# Altium PCB DataPCB 2.1.PcbDoc
Units mil, origin at the board's own origin, x right, y up, seen from the top; angles counter-clockwise.
Board outline 1500 x 1687.5 mil, 2 copper layers (Top Layer, Bottom Layer); 51 components, 66 nets, 295 pads, 137 vias.
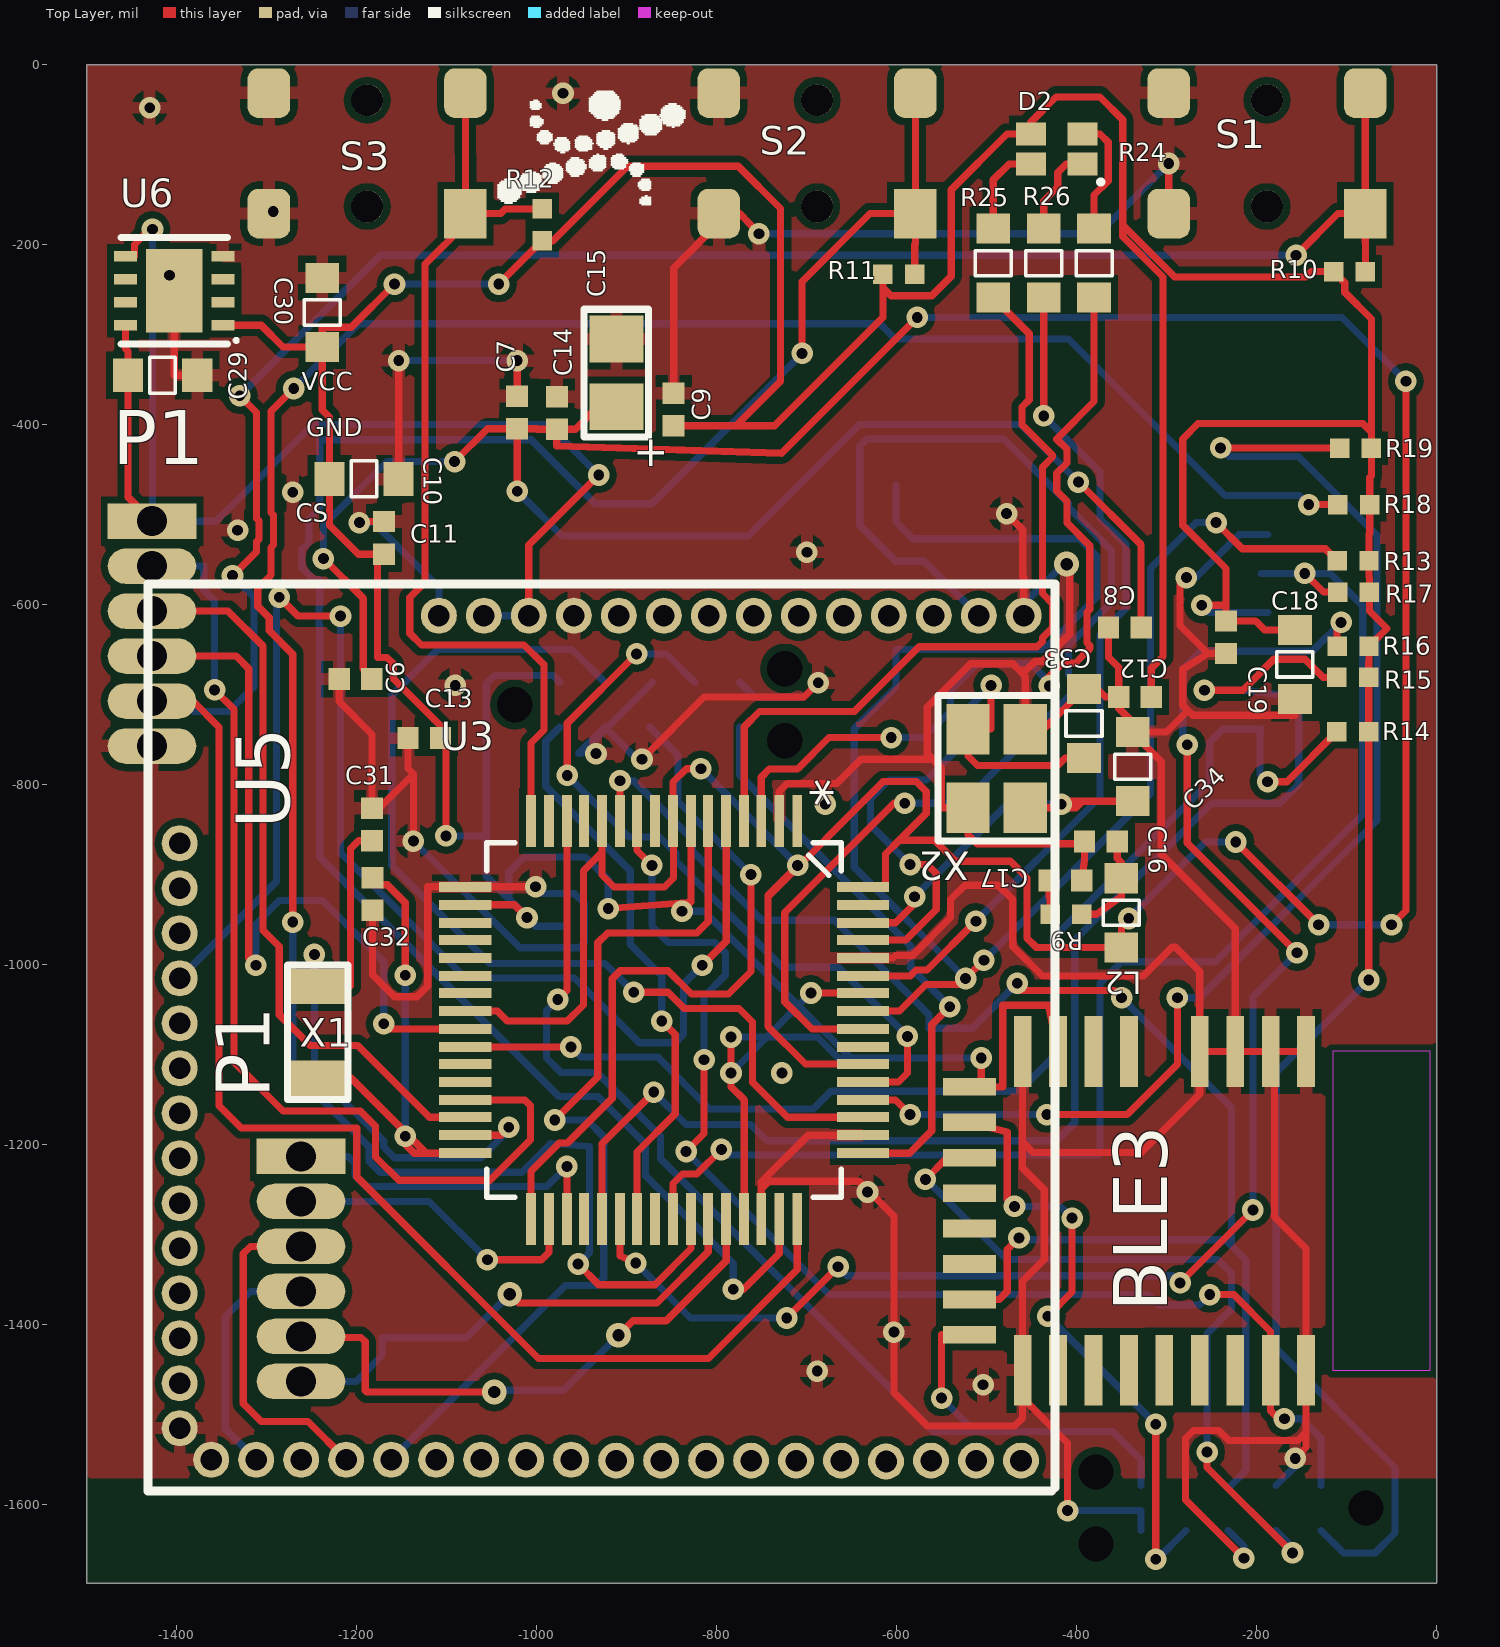
[diagram p0: Top Layer view]
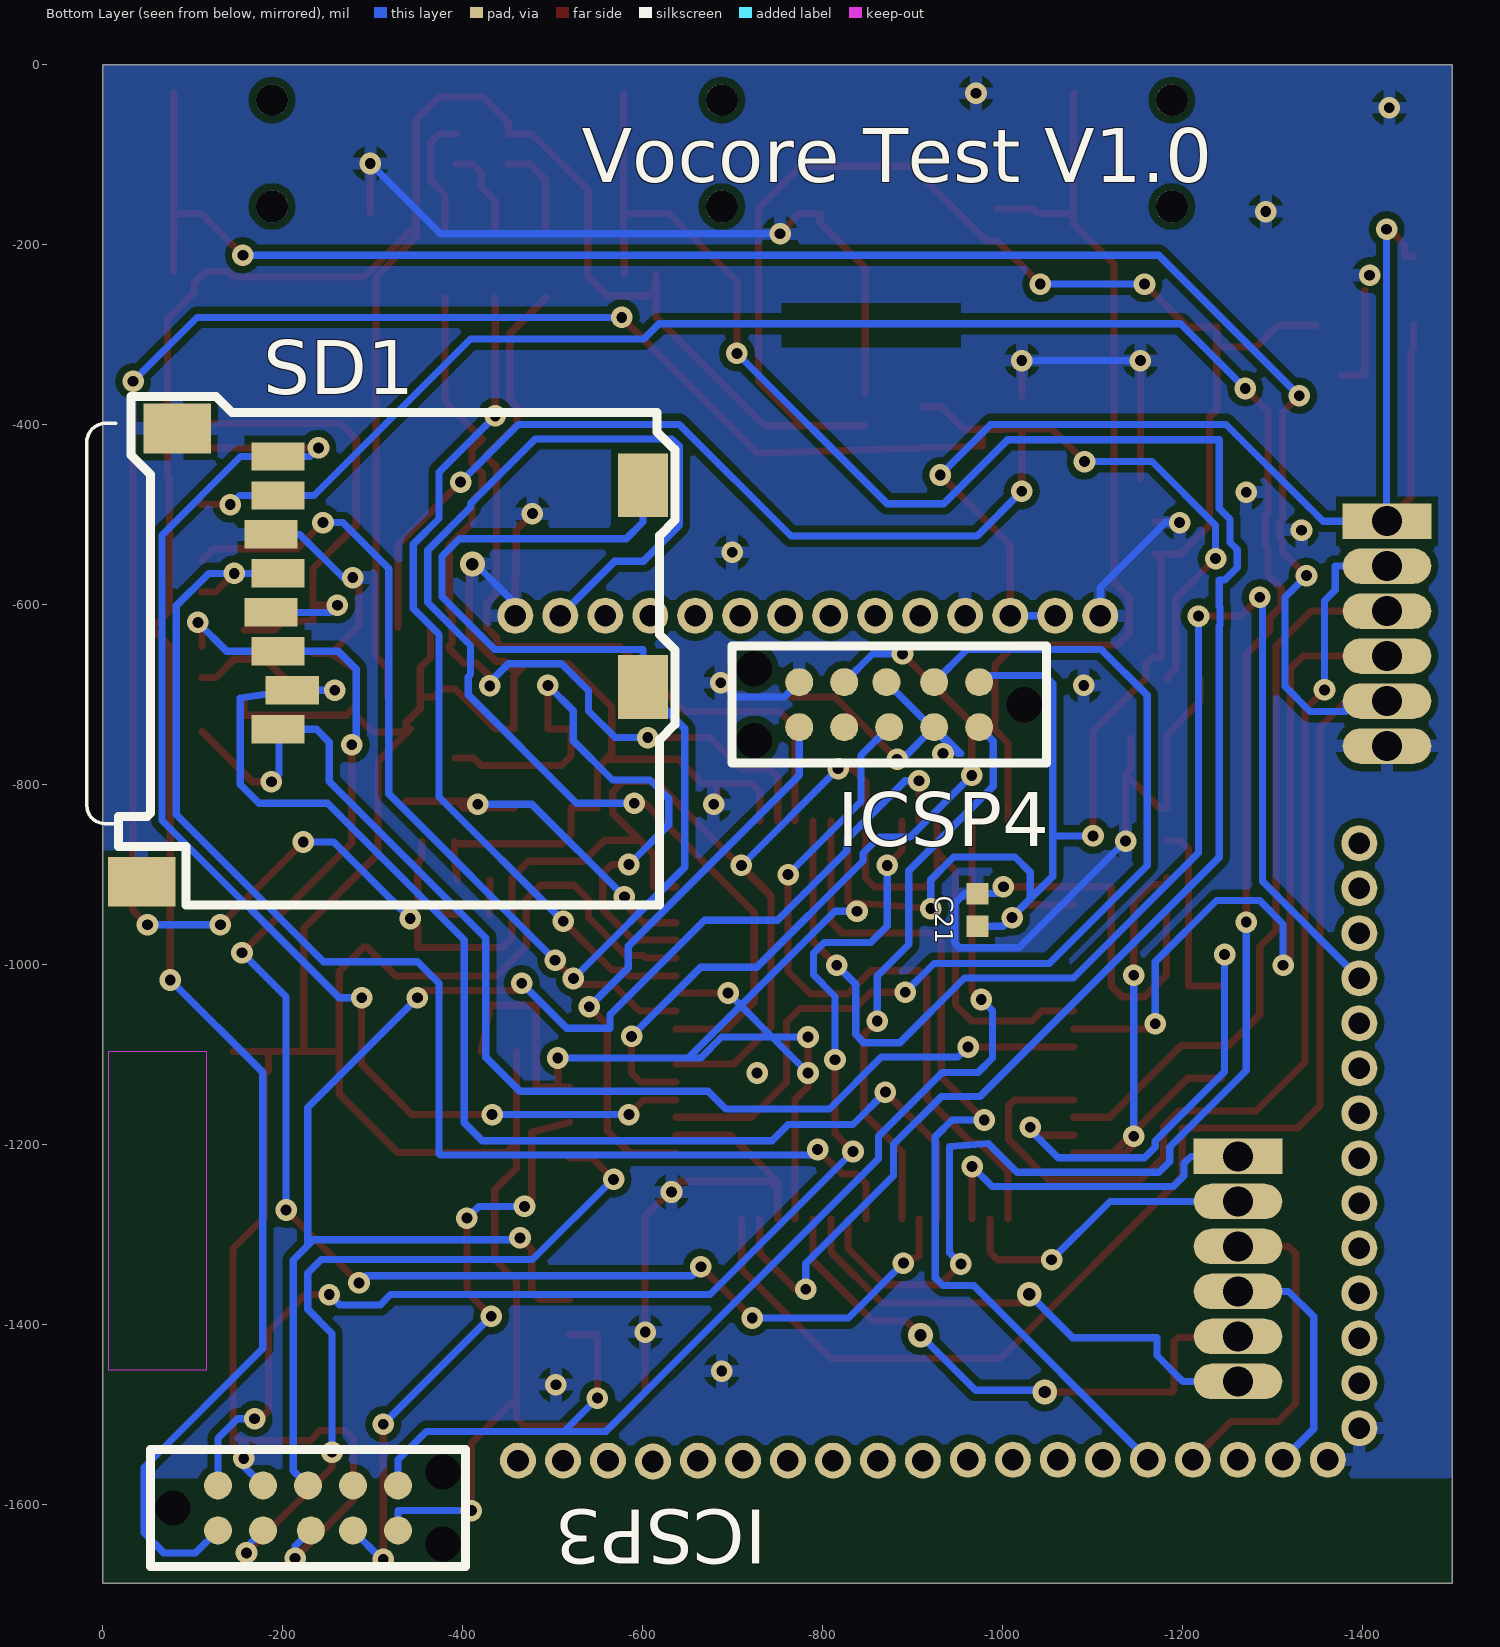
[diagram p1: Bottom Layer view, seen from below]

## Layer stack, top to bottom
Top Solder: solder mask 0.4, Solder Resist, Dk 3.5
Top Layer: signal copper 1.4
Dielectric 1: dielectric 12.6, FR-4, Dk 4.8
Bottom Layer: signal copper 1.4
Bottom Solder: solder mask 0.4, Solder Resist, Dk 3.5

## Board outline
-1500,-1687.5 -1500,0 0,0 0,-1687.5 -62.26,-1687.5 -416.54,-1687.45 -572.79,-1687.45 -572.83,-1687.5 -1083.42,-1687.5

## Design rules (kind name [scope] priority, off if disabled: settings)
Clearance [All] p1: gap=8
ComponentClearance ComponentClearance_1 [InComponent('U5')] p1: gap=-1000 collisioncheckmode=3 verticalgap=100000 showdistances=FALSE
ComponentClearance [All] p2: gap=10 collisioncheckmode=3 verticalgap=10 showdistances=FALSE
PlaneConnect [All] p1: planeconnectstyle=Relief reliefexpansion=20 reliefentries=4 reliefconductorwidth=13.78 reliefairgap=7.87
PolygonConnect [All] p1: connectstyle=Relief reliefconductorwidth=13.78 reliefentries=4 polygonreliefangle="90 Angle" airgapwidth=7.87
RoutingVias [All] p1: holewidth=12 width=24 viastyle="Through Hole" minholewidth=12 minwidth=24 maxholewidth=50 maxwidth=100
SilkToSilkClearance [All] p1: silktosilkclearance=0
SilkToSolderMaskClearance [IsPad] p1: minsilkscreentomaskgap=0 clearancetoexposedcopper=TRUE
SolderMaskExpansion [All] p1: expansion=4
Width [All] p1: maxlimit=78.74 minlimit=7 preferedwidth=8
26 further rules are at their usual default settings.

## Components (designator, comment, footprint, x,y, rotation, side; value= is the part's Value field where it differs from the comment)
BLE3 "QS9322" QS9322 -519,-1096.5 r270 top
C6 "" "CAP 0402" -1201.39,-682.79 r180 top
C7 "" "CAP 0402" -1021.69,-386.4 r90 top
C8 "" "CAP 0402" -346.37,-625.51 r180 top
C9 "" "CAP 0402" -847.71,-383.08 r90 top
C10 "" 0603 -1191.11,-460.18 r0 top
C11 "" "CAP 0402" -1169.75,-525.8 r90 top
C12 "" "CAP 0402" -335.08,-702.6 r180 top
C13 "" "CAP 0402" -1124.96,-748.41 r180 top
C14 "" "CAP 0402" -977.6,-386.93 r90 top
C15 "" 0805 -911.3,-342.66 r90 top
C16 "" "CAP 0402" -372.96,-863.33 r180 top
C17 "" "CAP 0402" -412.43,-906.35 r180 top
C18 "" 0603 -157.21,-667.05 r270 top
C19 "" "CAP 0402" -233.91,-636.25 r270 top
C21 "" "CAP 0402" -972.18,-939.26 r90 bottom
C29 "" 0603 -1414.98,-344.8 r0 top
C30 "" 0603 -1238.43,-274.67 r90 top
C31 "" "CAP 0402" -1182.93,-844.22 r90 top
C32 "" "CAP 0402" -1182.3,-921.54 r270 top
C33 "4pF" 0603 -391.87,-731.32 r90 top
C34 "4pF" 0603 -337.78,-779.35 r90 top
D2 "LED2_RGB" "LED RGB" -422.05,-93.7 r180 top locked
ICSP3 "TC2050" TC2050-IDC-NL -78.4,-1603.77 r180 bottom
ICSP4 "TC2050" TC2050-IDC-NL -1024.3,-711.11 r0 bottom
L2 "" 0603 -350.11,-943.12 r270 top
P1 "header 6 pin" "Header 6 1.27mm" -1427.48,-507.19 r0 top
P1 "header 6 pin" "Header 6 1.27mm" -1261.9,-1213.2 r0 top
R9 "" "RES 0402" -411.76,-944.08 r0 top
R10 "" "RES 0402" -96.67,-229.79 r180 top
R11 "" "RES 0402" -597.5,-232.72 r180 top
R12 "" "RES 0402" -994,-177.94 r270 top
R13 "" "RES 0402" -92.75,-551 r0 top
R14 "" "RES 0402" -93.07,-741.26 r0 top
R15 "" "RES 0402" -93,-680.82 r0 top
R16 "" "RES 0402" -92.75,-646.32 r0 top
R17 "" "RES 0402" -92.26,-586.04 r0 top
R18 "" "RES 0402" -92.01,-488.76 r0 top
R19 "" "RES 0402" -90.05,-426.03 r0 top
R24 "" 0603 -380.72,-219.78 r90 top
R25 "" 0603 -492.65,-219.78 r90 top
R26 "" 0603 -436.69,-219.78 r90 top
S1 "Power" "Tac Sw RA SMT" -187.4,-98.43 r90 top locked
S2 "Action 1" "Tac Sw RA SMT" -687.4,-98.43 r90 top locked
S3 "Action 2" "Tac Sw RA SMT" -1187.4,-98.43 r90 top locked
SD1 "MICRO SD" MICRO_SD_WE -187.23,-608.54 r90 bottom locked (schematic designator SD1x)
U3 "Flash MCU" QFP50P1200X1200X160-64N -858.43,-1061.56 r270 top
U5 "VoCore" VoCore -1431.72,-1585.22 r0 top
U6 "" "DFN8 U-DFN3030-8" -1402.86,-251.19 r90 top
X1 "Xtal 32" "Xtal smd 32khz - larger" -1243.33,-1075.09 r270 top
X2 "Xtal 16" "XTAL SMD 3.2X2.5" -489.07,-781.58 r270 top

## Footprints (in the part's own frame and the unit in brackets; to place one, negate y for a bottom-side part, rotate by r counter-clockwise, add the part's x,y. Pads: shape width x height; smd on the part's side, far side on the other; paste and mask are expansions set on the pad)
0603 [mm] "SMT  0603"
  rect 0.85x0.95 smd: 1(-0.992,-0.003) 2(0.958,-0.003)
  silkscreen extent -0.38,-0.51 0.34,0.5, body extent -0.89,-0.43 0.86,0.42, height 1
0805 [mil]
  rect 52x60 smd: 1(-37.4,0) 2(38,0)
  silkscreen extent -71,-35 71,36
"CAP 0402" [mm] "Chip Capacitor, 2-Leads, Body 1.00x0.50mm, IPC Medium Density"
  rect 0.6x0.62 smd: 1(-0.46,0) 2(0.46,0)
  body extent -0.53,-0.28 0.53,0.27, height 0.4
"DFN8 U-DFN3030-8" [mm]
  rect 2.35x1.6 smd: 0(0,0)
  rect 0.3x0.65 smd: 1(-0.975,-1.375) 2(-0.325,-1.375) 3(0.325,-1.375) 4(0.975,-1.375) 5(0.975,1.375) 6(0.325,1.375) 7(-0.325,1.375) 8(-0.975,1.375)
  silkscreen extent -1.5,-1.8 1.5,1.5
"Header 6 1.27mm" [mm] "SIP Header 1.27mm 6 pins"
  rect 2.5x1 hole 0.85: 1(0,0)
  oval 2.5x1 hole 0.85: 2(0,-1.27) 3(0,-2.54) 4(0,-3.81) 5(0,-5.08) 6(0,-6.35)
  body extent -1.15,-7.15 1.06,0.85, height 6
"LED RGB" [mm] "160-2162-1-ND"
  rect 0.85x0.65 smd: 1(-0.725,0.425) 2(0.725,0.425) 3(-0.725,-0.425) 4(0.725,-0.425)
  silkscreen extent -1.25,0.93 -1.23,0.93, body extent -1.11,-0.75 1.16,0.75, height 1
MICRO_SD_WE [mm] "MICRO SD CARD PUSH-PUSH  from WE  693071010811"
  rect 1.4x1.9 smd: 0(-7.61,3.65) 0(5.19,2.65)
  rect 0.8x1.5 smd: 1(-3.3,-0.2) 2(-2.2,-0.6) 3(-1.1,-0.2) 4(0,0) 5(1.1,-0.2) 6(2.2,0) 7(3.3,-0.2) 8(4.4,-0.2)
  rect 1.8x1.4 smd: CD(-2.11,-10.5) CD(3.59,-10.5)
  silkscreen extent -8.26,-11.4 6.09,5.2, body extent -8.36,-10.87 5.64,4.33, height 1.83
QFP50P1200X1200X160-64N [mil]
  rect 58x11 smd: 1(-221,148) 2(-221,128) 3(-221,108) 4(-221,89) 5(-221,69) 6(-221,49) 7(-221,30) 8(-221,10) 9(-221,-10) 10(-221,-30) 11(-221,-49) 12(-221,-69) 13(-221,-89) 14(-221,-108) 15(-221,-128) 16(-221,-148) 33(221,-148) 34(221,-128) 35(221,-108) 36(221,-89) 37(221,-69) 38(221,-49) 39(221,-30) 40(221,-10) 41(221,10) 42(221,30) 43(221,49) 44(221,69) 45(221,89) 46(221,108) 47(221,128) 48(221,148)
  rect 11x58 smd: 17(-148,-221) 18(-128,-221) 19(-108,-221) 20(-89,-221) 21(-69,-221) 22(-49,-221) 23(-30,-221) 24(-10,-221) 25(10,-221) 26(30,-221) 27(49,-221) 28(69,-221) 29(89,-221) 30(108,-221) 31(128,-221) 32(148,-221) 49(148,221) 50(128,221) 51(108,221) 52(89,221) 53(69,221) 54(49,221) 55(30,221) 56(10,221) 57(-10,221) 58(-30,221) 59(-49,221) 60(-69,221) 61(-89,221) 62(-108,221) 63(-128,221) 64(-148,221)
  silkscreen extent -197,-197 197,197
QS9322 [mm] "QS9322 Bluetooth 4.0 Low Energy Module"
  rect 2x0.5 smd: 1(9,9.5) 2(9,8.5) 3(9,7.5) 4(9,6.5) 5(9,5.5) 6(9,4.5) 7(9,3.5) 8(9,2.5) 9(9,1.5) 18(0,1.5) 19(0,2.5) 20(0,3.5) 21(0,4.5) 22(0,6.5) 23(0,7.5) 24(0,8.5) 25(0,9.5)
  rect 0.5x1.5 smd: 10(8,0) 11(7,0) 12(6,0) 13(5,0) 14(4,0) 15(3,0) 16(2,0) 17(1,0)
  Keep-Out Layer region: 0,10.25 9,10.25 9,13 0,13
  body extent 0,0 9,10.25, height 1
"RES 0402" [mm] "Chip Resistor, 2-Leads, Body 1.00x0.50mm, IPC Medium Density"
  rect 0.55x0.55 smd: 1(-0.45,0) 2(0.45,0)
  body extent -0.53,-0.27 0.53,0.28, height 0.4
"Tac Sw RA SMT" [mm] "TE 1571262-2   SWITCH TACTILE SPST-NO 0.05A 12V"
  round 0.9 hole 0.9 unplated paste+0 mask+0: 0(-1.5,0.025) 0(1.5,0.025)
  rect 1.4x1.2 smd: 1(-1.7,-2.75)
  rrect50% 1.4x1.2 smd: 2(-1.7,2.8) 3(1.7,-2.75) 4(1.7,2.8)
  body extent -2.81,-2.67 4.34,2.73, height 1.7
TC2050-IDC-NL [mm] "Tag-Connect 10-Pin with No Legs (PN# TC2050-IDC-NL)"
  round 0.9 hole 0.995 unplated: 0(0,0) 0(7.62,-1.016) 0(7.62,1.016)
  round 0.79 smd paste-0.39: 1(1.27,-0.635) 2(2.54,-0.635) 3(3.89,-0.635) 4(5.08,-0.635) 5(6.35,-0.635) 6(6.35,0.635) 7(5.08,0.635) 8(3.81,0.635) 9(2.54,0.635) 10(1.27,0.635)
  silkscreen extent -0.63,-1.65 8.26,1.65
VoCore [mil] "Vocore Module headers"
  round 40 hole 24: 1(973,973) 2(923,973) 3(873,973) 4(823,973) 5(773,973) 6(723,973) 7(673,973) 8(623,973) 9(573,973) 10(523,973) 11(473,973) 12(423,973) 13(373,973) 14(323,973) 15(35,720) 16(35,670) 17(35,620) 18(35,570) 19(35,520) 20(35,470) 21(35,420) 22(35,370) 23(35,320) 24(35,270) 25(35,220) 26(35,170) 27(35,120) 29(35,70) 29(70,35) 30(120,35) 31(170,35) 32(220,35) 33(270,35) 34(320,35) 35(370,35) 36(420,35) 37(470,35) 38(520,34) 39(570,34) 40(620,34) 41(670,34) 42(720,34) 43(770,34) 44(820,33) 45(870,34) 46(920,34) 47(970,34)
  silkscreen extent 0,0 1008,1008
"XTAL SMD 3.2X2.5" [mil]
  rect 56x48 smd: 0(-43.31,32) 0(44,-31.5) 1(-43.31,-31.5) 2(44,32)
  silkscreen extent -81,-65 81,65
"Xtal smd 32khz - larger" [mm] "ST3215SB  3.2×1.5mm"
  rect 1x1.55 smd: 1(-1.3,0) 2(1.3,0)
  silkscreen extent -1.9,-0.85 1.9,0.85

## Part data
BLE3: "QS9322 Bluetooth 4.0 Low Energy Module"
C6 C7 C8 C9 C10 C11 C12 C13 C14 C16 C18 C19 C21 C29 C30: library part Cap
C15: library part A01-0492
C17: library part A01-0046
C31 C32: library part A01-0013
C33 C34: library part A01-0018
D2: "RGB Led"
ICSP3 ICSP4: "ICSP Header"
L2: library part Inductor, "Inductor"
R9: library part A02-0284
R10 R11 R12 R13 R14 R15 R16 R17 R18 R19: library part Res3
R24 R25 R26: library part Res3, "Resistor"
S1 S2 S3: library part "SW PUSHBUTTON", "SWITCH TACT 2.36MM SILV J-LEAD"
SD1: library part "MICRO SD SMK"
U3: library part ATSAM3S4BA-AU
U6: library part "AP7361-33FGE-7 LDO 3.3V", "IC REG LDO 3.3V 1A 8DFN"
X2: library part "Xtal 12"

## Via types
v1: diameter 24, hole 12, Top Layer to Bottom Layer, 133 vias
v2: diameter 27.56, hole 13.78, Top Layer to Bottom Layer, 4 vias

## Nets (pads, with @x,y where several pads share a name; then routed paths per layer and width w, separated by ;. In a path a pad name is that pad's centre, name@x,y a point inside that pad or via, vN(x,y) a via of type N, cw(c..) or ccw(c..) an arc to the next point about the centre after c; other vN are vias at no path point)
"ACTION 1 SW": R11.1 S2.1 S2.3 U3.47 | length 2359.7
  Top Layer w8: v1(-781.49,-1360.79) -770.04,-1360.79 -730.43,-1321.18 U3.47 ; v1(-705,-320.75) -705,-240.75 -629.6,-165.35 S2.1 ; R11.1 -579.78,-199.75 -579.13,-199.11 S2.1 ; S2.3 S2.1
  Bottom Layer w8: v1(-781.49,-1360.79) -781.49,-1332.26 -879,-1234.75 -879,-1199.75 -932,-1146.75 -975,-1146.75 -1241,-880.75 -1241,-623.69 -1242,-622.69 -1242,-602.81 -1241,-601.81 -1241,-572.75 -1246.94,-572.75 -1261,-558.69 -1261,-538.81 -1253,-530.81 -1253,-505.12 -1241,-493.12 -1241,-416.75 -1006,-416.75 -935,-487.75 -872,-487.75 v1(-705,-320.75)
"ACTION 2 SW": R12.1 S3.1 S3.3 U3.16 | length 1056.5
  Top Layer w8: S3.3 -1079.13,-98.62 -1079,-98.75 S3.1@-1079,-165.35 ; U3.16 -1006.43,-753.75 -992,-739.32 -992,-666.75 -1014,-644.75 -1128,-644.75 -1141,-631.75 -1141,-592.05 -1124,-575.05 -1124,-221.75 -1079.13,-176.88 S3.1 S3.1@-1079,-165.35 ; R12.1 -1034.87,-160.22 -1040,-165.35 S3.1@-1079,-165.35
BLE1_RX: U3.6 U5.33 | length 1000
  Top Layer w8: v1(-980,-1172.75) -932.08,-1124.83 -932.08,-975.75 -921.08,-964.75 -822,-964.75 -809.43,-952.18 U3.6
  Bottom Layer w8: U5.33 -968.25,-1356.75 -934,-1356.75 -925.38,-1348.13 -925.38,-1191.37 -944,-1172.75 v1(-980,-1172.75)
BLE1_TX: U3.5 U5.18 | length 1538
  Top Layer w8: v1(-1286,-591.75) -1265,-612.75 v1(-1218,-612.75) ; v1(-816,-1000.75) -789.43,-974.18 U3.5
  Bottom Layer w8: U5.18 -1289,-907.5 -1289,-594.75 v1(-1286,-591.75) ; v1(-1218,-612.75) -1218,-875.75 -1079,-1014.75 -958,-1014.75 -886,-1086.75 -846,-1086.75 -837,-1077.75 -837,-1021.75 v1(-816,-1000.75)
BLE2_RX: P1.2@-1261.9,-1263.2 U3.34 | length 342.9
  Top Layer w8: v1(-1054.76,-1327.99) -994.66,-1327.99 -986.43,-1319.75 U3.34
  Bottom Layer w8: P1.2@-1261.9,-1263.2 -1119.55,-1263.2 v1(-1054.76,-1327.99)
BLE2_TX: P1.1@-1261.9,-1213.2 U3.35 | length 385
  Top Layer w8: U3.35 v1(-966.43,-1224.39)
  Bottom Layer w8: P1.1@-1261.9,-1213.2 -1209.53,-1213.2 -1202,-1220.72 -1202,-1234.75 -1190,-1246.75 -988.78,-1246.75 v1(-966.43,-1224.39)
BLE3_CLK: BLE3.8
BLE3_CS: BLE3.7
BLE3_MISO: BLE3.5
BLE3_MOSI: BLE3.6
BLE3_RX: BLE3.10 ICSP3.6 U3.14 | length 1315.2
  Top Layer w8: v1(-976.61,-1038.75) -966.43,-1028.57 U3.14 ; v1(-550,-1481.75) -550,-1411.46 BLE3.10
  Bottom Layer w8: v1(-976.61,-1038.75) -989.19,-1051.33 -989.19,-1103.75 -973.19,-1119.75 -933.38,-1119.75 -862.41,-1190.71 -862.41,-1215.75 -559.31,-1518.85 -512.9,-1518.85 ; v1(-550,-1481.75) -512.9,-1518.85 ; ICSP3.6 -328.4,-1550.35 -359.9,-1518.85 -512.9,-1518.85
BLE3_SCL: BLE3.4
BLE3_SDA: BLE3.3
BLE3_TX: BLE3.11 ICSP3.8 U3.11 | length 1720.5
  Top Layer w8: U3.11 v1(-907.43,-795.75) ; BLE3.11 -486,-1372.09 -477,-1363.09 -477,-1316.75 v1(-464,-1303.75) ; v1(-466,-1020.75) -466,-1028.75 -358,-1028.75 v1(-350,-1036.75)
  Bottom Layer w8: v1(-907.43,-795.75) -892,-795.75 -827,-860.75 -827,-873.75 -750,-950.75 -669,-950.75 -564,-1055.75 -564,-1070.75 -516,-1070.75 v1(-466,-1020.75) ; v1(-464,-1303.75) -462,-1305.75 -234.4,-1305.75 -228,-1312.15 ; v1(-350,-1036.75) -228,-1158.75 -228,-1312.15 ; ICSP3.8 -212,-1562.38 -212,-1328.15 -228,-1312.15
BLE_RST1: U3.56 U5.2 | length 1396.8
  Top Layer w8: U3.56 -694,-1071.56 -724.37,-1041.19 -724.37,-942.12 -602.87,-820.62 v1(-591,-820.62)
  Bottom Layer w8: v1(-591,-820.62) -526.84,-820.62 -406.44,-700.22 -406.44,-680.33 -409,-677.77 -409,-645.38 -361.35,-597.73 -361.35,-539.47 -409,-491.82 -409,-487.75 -481,-415.75 -633,-415.75 -641,-423.75 -641,-511.75 -601,-551.75 -569.18,-551.75 U5.2
BLE_RST2: U3.9
BLE_RST3: BLE3.2 ICSP3.10 U3.10 | length 1407.6
  Top Layer w8: U3.10 -888.43,-873.32 v1(-872,-889.75) ; v1(-834,-1207.75) -814,-1187.75 v1(-814,-1105.75) ; v1(-252,-1366.75) -225.35,-1366.75 -184.35,-1407.75 BLE3.2 -184.35,-1495.75 -175.35,-1504.75 v1(-169,-1504.75)
  Bottom Layer w8: v1(-872,-889.75) -872,-957.12 -853.52,-975.6 -801.78,-975.6 -790,-987.38 -790,-1011.38 -814,-1035.38 v1(-814,-1105.75) ; v1(-834,-1207.75) -675,-1366.75 -320.13,-1366.75 -308.6,-1378.28 -263.53,-1378.28 v1(-252,-1366.75) ; v1(-169,-1504.75) -150,-1504.75 -128.4,-1526.35 ICSP3.10
BLUELED: R24.1 U3.3 | length 951.3
  Top Layer w8: U3.3 -750.43,-791.75 -741.43,-782.75 -710,-782.75 -675,-747.75 v1(-606,-747.75) ; v1(-430.44,-690.27) -430.44,-685.02 -433,-682.46 -415.41,-664.87 -401.26,-664.87 -385.26,-648.88 -385.26,-645.71 -388.29,-642.69 -388.29,-608.34 -385.26,-605.31 -385.26,-534.49 -410.72,-509.03 -410.72,-484.98 -422,-473.69 -422,-453.81 -410.72,-442.53 -410.72,-427.35 -422,-416.06 -422,-415.75 -380.59,-374.34 R24.1
  Bottom Layer w8: v1(-606,-747.75) -569.71,-747.75 -540,-718.04 -540,-695.75 -510,-665.75 -451,-665.75 -430.44,-686.31 v1(-430.44,-690.27)
CS_SPI: U3.63
GND: BLE3.1 BLE3.9 BLE3.18 BLE3.22 BLE3.23 BLE3.24 BLE3.25 C6.2 C7.2 C8.2 C9.2 C10.2 C11.2 C12.2 C13.2 C14.2 C15.2 C16.2 C17.1 C18.2 C19.2 C21.2 C29.2 C30.2 C31.2 C32.2 C33.2 C34.2 ICSP3.3 ICSP3.5 ICSP3.9 ICSP4.3 ICSP4.5 ICSP4.9 P1.6@-1427.48,-757.19 S1.2 S1.4 S2.2 S2.4 S3.2 S3.4 SD1.0 SD1.6 U3.2 U3.17 U3.46 U3.50 U3.60 U5.1 U5.11 U5.14 U5.29 U6.0 U6.4 X2.0 | length 8591.7
  Top Layer w8: U6.0 -1402.86,-344.94 C29.2 ; C6.2 -1219.5,-707.75 -1182.93,-744.32 C31.2 -1175,-826.11 -1136.96,-788.07 ; v1(-1197,-508.75) -1195.94,-507.69 C11.2 ; C32.2 -1182.3,-1011.45 -1158,-1035.75 -1133,-1035.75 -1121,-1023.75 -1121,-913.56 U3.17 v1(-1001.22,-913.56) ; C10.2 v1(-1153.39,-328.75) ; C13.2 -1143.07,-781.97 -1136.96,-788.07 ; v1(-1136.96,-862.79) -1136.96,-788.07 ; C7.2 v1(-1021.69,-328.75) ; v1(-883,-771.75) -814,-702.75 -703,-702.75 v1(-687,-686.75) ; C9.2 -847.71,-225.75 -797.64,-175.68 S2.2 -774,-165.35 v1(-753,-187.75) ; U3.46 -750.43,-1249.18 ; U3.2 -730.43,-807.75 -721.43,-798.75 -682.88,-798.75 ; v1(-679.2,-821.88) -682.88,-818.2 -682.88,-798.75 ; U3.50 -698.24,-1189.56 -750.43,-1241.75 -750.43,-1249.18 ; U3.60 -604,-992.56 -601.19,-989.75 -582,-989.75 -540,-947.75 -540,-927.75 -524,-911.75 -487,-911.75 -471,-927.75 -471,-979.75 -438,-1012.75 -326,-1012.75 -294,-980.75 -290.09,-980.75 -263.09,-1007.75 BLE3.22 ; v1(-477.77,-498.83) -459.74,-516.86 -459.74,-568.45 -458.72,-569.47 U5.1 ; BLE3.18 -459.94,-1197.38 ; v2(-411.04,-554.91) -407.53,-558.43 -407.53,-632.97 -437.37,-662.82 -446.01,-662.82 -455.91,-672.72 -464.03,-672.72 ; v1(-410,-1606.75) -410,-1531.69 BLE3.9@-459.94,-1481.75 ; C17.1 -391.07,-883.5 C16.2@-391.07,-865.75 ; C16.2 C16.2@-391.07,-865.75 ; C8.2 -364.48,-658.46 -353.19,-669.75 C12.2 ; C34.2@-342,-738.27 -306,-774.27 -306,-877.47 -223.72,-959.75 BLE3.23 ; S1.2 v1(-297.64,-109.75) ; v1(-278,-569.92) -285.12,-577.04 -285.12,-623.24 -254,-654.36 ; C19.2 -254,-654.36 ; v1(-214,-1659.75) -279,-1594.75 -279,-1526.75 -270,-1517.75 -242,-1517.75 -231,-1528.75 -153.98,-1528.75 -144.98,-1519.75 ; C18.2 -157.34,-722.85 -271,-722.85 -271,-722.75 -276.09,-717.66 ; v1(-157,-1548.75) -144.98,-1536.73 -144.98,-1519.75 ; BLE3.25 BLE3.24 ; -750.43,-1249.18 -742,-1240.75 -642,-1240.75 -603,-1279.75 -603,-1475.75 -566,-1512.75 -468.94,-1512.75 -459.94,-1503.75 BLE3.9@-459.94,-1481.75 ; -682.88,-798.75 -666.48,-798.75 -639.48,-771.75 -559.87,-771.75 ; -559.87,-771.75 -566,-765.62 -566,-713.75 -518,-665.75 -471,-665.75 -464.03,-672.72 ; -559.87,-771.75 -550,-781.62 -550,-825.58 -520.56,-825.58 -520.56,-855.75 -510.56,-865.75 C16.2@-391.07,-865.75 ; -464.03,-672.72 -457.07,-679.68 -457.07,-738.27 -436.41,-738.27 C33.2 -377,-693.6 -368,-702.6 C12.2 ; BLE3.9@-459.94,-1481.75 BLE3.9 -459.94,-1351.69 -436,-1327.75 -436,-1250.22 -459.94,-1226.28 -459.94,-1197.38 ; -459.94,-1197.38 -448.58,-1208.75 -328.09,-1208.75 -263.09,-1143.75 BLE3.22 ; C12.2 -353.19,-715.21 -337.65,-730.75 C34.2 -300.06,-741.63 -276.09,-717.66 ; -276.09,-717.66 -282,-711.75 -282,-671.75 -254,-654.36 ; BLE3.22 BLE3.23 ; BLE3.23 BLE3.24 ; BLE3.24 -184.35,-1118.37 -180,-1118.37 -180,-1280.56 -144.98,-1315.57 BLE3.1 -144.98,-1519.75
  Bottom Layer w8: v1(-1197,-508.75) -1181,-508.75 -1108.72,-581.03 U5.14 ; v1(-1153.39,-328.75) v1(-1021.69,-328.75) ; v1(-1136.96,-862.79) -1018.5,-981.25 -952.5,-981.25 -947,-975.75 -947,-932.15 -958,-921.15 C21.2 -993.64,-921.15 v1(-1001.22,-913.56) ; v1(-883,-771.75) -888.66,-771.75 ICSP4.9@-922.72,-737.69 ; ICSP4.3 ICSP4.9@-922.72,-737.69 ; ICSP4.5 -757.66,-702.75 -703,-702.75 v1(-687,-686.75) ; v1(-753,-187.75) -375.64,-187.75 v1(-297.64,-109.75) ; U5.1 -458.72,-599.07 -411.04,-551.39 v2(-411.04,-554.91) ; v1(-410,-1606.75) -328.4,-1606.75 ICSP3.5 ; v1(-278,-569.92) -267.16,-569.92 -219.16,-521.92 SD1.6 ; ICSP3.3 -214,-1646.32 v1(-214,-1659.75) ; ICSP3.9 -157,-1557.38 v1(-157,-1548.75) ; ICSP4.9@-922.72,-737.69 ICSP4.9 -953.69,-765.51 -950.54,-765.51 ICSP4.9@-922.72,-737.69
  other v1: -503.83,-1466.83 -688.29,-1451.76 -603.06,-1408.36 -632.31,-1252.69 -934.06,-765.51 -1090.49,-689.67 -699.74,-541.78 -1332.44,-517.21 -1271.12,-475.07 -1408.12,-233.87 -1292.81,-163.15 -1430.08,-47.74 -970.76,-31.66
GREENLED: R25.1 U3.4 | length 905.4
  Top Layer w8: U3.4 -769.43,-735.75 -752.43,-718.75 -647.02,-718.75 -575.08,-646.82 -444,-646.82 -438,-640.81 -438,-636.76 -426.72,-625.47 -426.72,-598.96 -438,-587.68 -438,-447.18 -426.72,-435.9 -426.72,-433.98 -460.55,-400.14 -460.55,-380.26 -452.55,-372.26 -452.55,-298.8 R25.1
I2C1: U3.36
I2C2: P1.6@-1261.9,-1463.2 U3.43 | length 568.4
  Top Layer w8: v2(-1029.84,-1366.46) -1020.12,-1376.18 -866.41,-1376.18 -809.43,-1319.2 U3.43
  Bottom Layer w8: P1.6@-1261.9,-1463.2 -1200.62,-1463.2 -1171.97,-1434.55 -1171.97,-1414.78 -1078.16,-1414.78 v2(-1029.84,-1366.46)
"JACK DETECT 1": U3.23
"JACK DETECT 2": P1.4@-1427.48,-657.19 U3.25 | length 835.1
  Top Layer w8: P1.4@-1427.48,-657.19 -1334,-657.19 -1320,-671.19 -1320,-992.75 v1(-1312,-1000.75) ; v1(-1170,-1065.75) -1164.19,-1071.56 U3.25
  Bottom Layer w8: v1(-1312,-1000.75) -1312,-954.75 -1286,-928.75 -1238,-928.75 -1170,-996.75 v1(-1170,-1065.75)
"JACK EN1": U3.13
"JACK EN2": U3.15
"JACK OC1": U3.19
"JACK OC2": U3.20
LBO: U3.28
MISO: U3.27
MOSI: U3.22
NetBLE3_15: BLE3.15 ICSP3.2 | length 836.2
  Top Layer w8: v1(-568,-1238.75) -543.86,-1214.61 BLE3.15 ; v1(-255,-1541.75) -255,-1558.75 v1(-160,-1653.75)
  Bottom Layer w8: v1(-568,-1238.75) -567,-1238.75 -478,-1327.75 -243,-1327.75 -228,-1342.75 -228,-1383.15 -255,-1410.15 v1(-255,-1541.75) ; ICSP3.2 -160,-1647.17 v1(-160,-1653.75)
NetBLE3_16: BLE3.16 ICSP3.4 | length 685.4
  Top Layer w8: BLE3.16 -477,-1186.24 -477,-1260.75 v1(-469,-1268.75) ; v1(-432,-1390.75) -405,-1363.75 v1(-405,-1281.75) ; v1(-312,-1660.75) v1(-312,-1510.75)
  Bottom Layer w8: v1(-469,-1268.75) -418,-1268.75 v1(-405,-1281.75) ; v1(-432,-1390.75) v1(-312,-1510.75) ; v1(-312,-1660.75) -310.37,-1660.75 ICSP3.4
NetC6_1: C6.1 C7.1 C8.1 C14.1 C15.1 L2.2 U3.8 U3.12 U3.24 U3.54 U3.64 | length 5422.9
  Top Layer w8: v1(-1237,-548.75) -1192.76,-592.99 -1192.76,-671.36 -1183.28,-680.84 C6.1 ; v1(-1091.26,-441.01) -1054.76,-404.51 C7.1 ; U3.24 -1043.8,-1051.56 -1032.61,-1062.75 -966,-1062.75 -948.08,-1044.83 -948.08,-895.83 -927.43,-875.18 ; v1(-1021.69,-474.06) C7.1 ; U3.12 -927.43,-875.18 ; C15.1 -932.03,-380.07 -957,-405.04 C14.1 ; v1(-817.5,-782.25) -833.5,-782.25 -848.43,-797.18 U3.8 -848.43,-865.56 -848,-865.99 -848,-903.75 -858,-913.75 -914,-913.75 -927.43,-900.32 -927.43,-875.18 ; v1(-710,-889.75) -743,-922.75 -743,-924.78 ; U3.54 -701.39,-1110.56 -743,-1068.95 -743,-924.78 ; U3.64 -612.43,-913.56 -612.43,-877.18 -597,-861.75 ; v1(-577,-280.75) -728,-431.75 -977.6,-423.75 C14.1 ; v1(-398,-463.75) -328.26,-533.49 C8.1 ; v1(-342,-948.75) -350.24,-956.99 L2.2 -444.91,-980.84 -455,-970.75 -455,-903.75 -473.56,-885.19 -534.56,-885.19 -558,-861.75 -597,-861.75 ; v1(-223,-863.75) v1(-131,-955.75) ; v1(-50,-955.75) -34,-939.75 v1(-34,-351.75) ; C7.1 -1000,-404.51 -999.47,-405.04 C14.1 ; -743,-924.78 -614.84,-796.62 -578.13,-796.62 -567,-807.75 -567,-831.75 -597,-861.75
  Bottom Layer w8: v1(-1237,-548.75) -1237,-511.75 -1166.26,-441.01 v1(-1091.26,-441.01) ; v1(-1021.69,-474.06) -972,-523.75 -765,-523.75 -641,-399.75 -462,-399.75 v1(-398,-463.75) ; v1(-817.5,-782.25) v1(-710,-889.75) ; v1(-577,-280.75) -105,-280.75 v1(-34,-351.75) ; v1(-342,-948.75) -257,-863.75 v1(-223,-863.75) ; v1(-131,-955.75) v1(-50,-955.75)
NetC16_1: C16.1 L2.1 R9.2 | length 113.1
  Top Layer w8: R9.2 -378.11,-944.08 -350.24,-924.55 L2.1 -350.24,-886.75 -354.85,-882.14 C16.1
NetC17_2: C17.2 R9.1 | length 38.2
  Top Layer w8: C17.2 -430.54,-924.69 -429.48,-925.75 R9.1
NetD2_1: D2.1 R26.2 | length 100.1
  Top Layer w8: R26.2 -436.55,-151.3 -421,-135.75 -421,-119.75 -411.68,-110.43 D2.1
NetD2_2: D2.2 R25.2 | length 103.4
  Top Layer w8: R25.2 -492.52,-127.75 -475.2,-110.43 D2.2
NetD2_3: D2.3 R24.2 | length 135
  Top Layer w8: D2.3 -374,-76.97 -364.77,-86.2 -364.77,-128.93 -380.59,-144.75 R24.2
NetICSP4_2: ICSP4.2 U3.51 | length 1140.7
  Top Layer w8: v1(-892.08,-1030.75) -854,-1030.75 -835.97,-1048.78 -775.03,-1048.78 -760.06,-1063.75 -760.06,-1130.69 -721.19,-1169.56 U3.51
  Bottom Layer w8: ICSP4.2 -960.66,-649.75 -1110,-649.75 -1161,-700.75 -1161,-889.95 -1052.2,-998.75 -924.08,-998.75 v1(-892.08,-1030.75)
NetICSP4_4: ICSP4.4 U3.53 | length 842
  Top Layer w8: v1(-966,-789.75) -966,-731.75 v1(-889,-654.75) ; U3.53 -598,-1130.56 -588,-1120.56 v1(-588,-1079.75)
  Bottom Layer w8: v1(-966,-789.75) -897.55,-858.2 -863.41,-858.2 -845.28,-876.32 -845.28,-884.76 -727.12,-1002.93 -664.82,-1002.93 v1(-588,-1079.75) ; v1(-889,-654.75) -855.66,-654.75 ICSP4.4
NetICSP4_6: ICSP4.6 U3.49 | length 640.3
  Top Layer w8: U3.49 -585.81,-1209.56 -561,-1184.75 -561,-1066.75 v1(-541,-1046.75)
  Bottom Layer w8: ICSP4.6 -774.3,-789.45 -584.25,-979.5 -584.25,-1003.5 v1(-541,-1046.75)
NetICSP4_8: ICSP4.8 U3.33 | length 806.8
  Top Layer w8: U3.33 -1006.43,-1229.79 -975.06,-1198.42 -966,-1198.42 -916.08,-1148.51 -916.08,-1015.75 -907.08,-1006.75 -854,-1006.75 -827.97,-1032.78 -786.95,-1032.78 -761.92,-1007.75 v1(-761.92,-899.93)
  Bottom Layer w8: ICSP4.8 -843,-767.41 -843,-818.84 v1(-761.92,-899.93)
NetICSP4_10: ICSP4.10 U3.39 | length 630.2
  Top Layer w8: U3.39 -888.43,-1208.18 -846,-1165.75 -846,-1077.75 v1(-861,-1062.75)
  Bottom Layer w8: ICSP4.10 -990,-751.81 -990,-801.75 -896,-895.75 -896,-977.75 -861,-1012.75 v1(-861,-1062.75)
"POWER SW": P1.5@-1427.48,-707.19 R10.1 S1.1 S1.3 U3.48 | length 3418.9
  Top Layer w8: P1.5@-1427.48,-707.19 -1382,-707.19 -1353,-736.19 -1353,-1156.79 -1328.28,-1181.51 -1199.87,-1181.51 -1199.87,-1235.85 -998.03,-1437.68 -809.2,-1437.68 -710.43,-1338.91 U3.48 ; v1(-1338,-567.75) -1311.37,-541.12 -1311.37,-530.08 -1308.44,-527.15 -1308.44,-507.27 -1311.37,-504.34 -1311.37,-386.52 v1(-1330,-367.89) ; v1(-156,-211.75) -109.6,-165.35 S1.1 ; S1.3 S1.1 ; R10.1 -78.96,-197.75 -79.13,-197.57 S1.1
  Bottom Layer w8: P1.5@-1427.48,-707.19 -1382,-707.19 -1382,-718.75 -1342,-718.75 -1314,-690.75 -1314,-591.75 v1(-1338,-567.75) ; v1(-1330,-367.89) -1173.86,-211.75 v1(-156,-211.75)
REDLED: R26.1 U3.59 | length 950.4
  Top Layer w8: U3.59 -584.81,-1012.56 -578.35,-1006.1 -566.28,-1006.1 v1(-511.93,-951.75) ; v1(-436.55,-390.2) R26.1
  Bottom Layer w8: v1(-511.93,-951.75) -373.98,-813.8 -373.98,-632.99 -345.35,-604.35 -345.35,-532.84 -373.98,-504.21 -373.98,-452.77 v1(-436.55,-390.2)
RXD: P1.3@-1261.9,-1313.2 U5.32 | length 374.1
  Top Layer w8: P1.3@-1261.9,-1313.2 -1318,-1313.2 -1326,-1321.2 -1326,-1487.75 -1306,-1507.75 -1254.18,-1507.75 U5.32
SPCK: U3.21
"SS RX": P1.2@-1427.48,-557.19 U3.29 | length 1157.9
  Top Layer w8: v1(-1358,-694.75) -1336.23,-716.52 -1336.23,-1108.52 -1282.04,-1162.71 -1196.04,-1162.71 -1179.02,-1179.73 -1179.02,-1213.73 -1153,-1239.75 -1052,-1239.75 -1007,-1194.75 -1007,-1156.75 -1013.19,-1150.56 U3.29
  Bottom Layer w8: P1.2@-1427.48,-557.19 -1370,-557.19 -1370,-583.75 -1358,-595.75 v1(-1358,-694.75)
"SS TX": P1.3@-1427.48,-607.19 U3.30 | length 810.4
  Top Layer w8: P1.3@-1427.48,-607.19 -1343,-607.19 -1304,-646.19 -1304,-961.97 -1286,-979.97 -1286,-1055.75 -1252,-1089.75 -1199,-1089.75 -1119.19,-1169.56 U3.30
STAT: P1.5@-1261.9,-1413.2 U3.44 | length 636.9
  Top Layer w8: P1.5@-1261.9,-1413.2 -1260.72,-1414.38 -1195.18,-1414.38 -1190.61,-1418.95 -1190.61,-1473.34 -1188.97,-1474.98 v2(-1047.16,-1474.98) ; v2(-909.03,-1411.9) -892.92,-1395.78 -856.08,-1395.78 -789.43,-1329.13 U3.44
  Bottom Layer w8: v2(-1047.16,-1474.98) -1045.32,-1473.14 -970.27,-1473.14 v2(-909.03,-1411.9)
TXD: P1.4@-1261.9,-1363.2 U5.30 | length 268.9
  Bottom Layer w8: U5.30 -1346,-1515.93 -1346,-1391.2 -1318,-1363.2 P1.4@-1261.9,-1363.2
"USD CD": R13.1 SD1.CD U3.57 | length 1924.5
  Top Layer w8: U3.57 -596.81,-1051.56 -567.35,-1022.1 -530.03,-1022.1 v1(-523.34,-1015.41) v1(-503,-995.07) ; v1(-245,-508.75) -216,-537.75 -123.71,-537.75 R13.1
  Bottom Layer w8: SD1.CD@-600.62,-467.2 -600.62,-508.13 -582,-526.75 -396.69,-526.75 -377.35,-546.09 -377.35,-591.1 -436,-649.75 -600.62,-649.75 -600.62,-691.61 -647,-737.99 -647,-891.75 v1(-523.34,-1015.41) ; v1(-503,-995.07) -318,-810.06 -318,-559.75 -267,-508.75 v1(-245,-508.75)
"USD CLK": R17.1 SD1.5 U3.41 | length 1497
  Top Layer w8: U3.41 -848.43,-1243.18 -838,-1232.75 -822,-1232.75 v1(-794.69,-1205.44) ; v1(-146.52,-565.23) -125.71,-586.04 R17.1
  Bottom Layer w8: v1(-794.69,-1205.44) -788.42,-1211.7 -375.37,-1211.7 -374,-1210.33 -374,-1020.75 -350,-996.75 -245.63,-996.75 -82,-833.12 -82,-601.23 -118,-565.23 v1(-146.52,-565.23) SD1.5
"USD CMD": R16.1 SD1.3 U3.38 | length 1736.1
  Top Layer w8: U3.38 -907.43,-1323.75 v1(-890,-1331.75) ; v1(-722,-1392.75) v1(-665,-1335.75) ; v1(-285,-1353.75) v1(-204,-1272.75) ; v1(-277,-755.75) -277,-864.75 v1(-155,-986.75) ; R16.1 -110.46,-624.21 v1(-106,-619.75)
  Bottom Layer w8: v1(-890,-1331.75) -829,-1392.75 v1(-722,-1392.75) ; v1(-665,-1335.75) -655,-1345.75 -293,-1345.75 v1(-285,-1353.75) ; v1(-277,-755.75) -282,-750.75 -282,-671.75 -262.1,-651.85 SD1.3 -138.1,-651.85 v1(-106,-619.75) ; v1(-204,-1272.75) -204,-1035.75 v1(-155,-986.75)
"USD DAT0": R18.1 SD1.7 U3.42 | length 2786.4
  Top Layer w8: v1(-1271,-952.75) -1271,-654.99 -1297.22,-628.77 -1297.22,-614.47 -1310,-601.69 -1310,-581.81 -1295.37,-567.18 -1295.37,-536.71 -1292.44,-533.78 -1292.44,-500.64 -1295.37,-497.71 -1295.37,-385.12 v1(-1270,-359.75) ; v1(-954,-1332.75) -931,-1355.75 -868.6,-1355.75 -828.43,-1315.57 U3.42 ; v1(-141.99,-488.76) R18.1
  Bottom Layer w8: v1(-1271,-952.75) -1271,-1117.75 -1186,-1202.75 -1186,-1218.75 -1174,-1230.75 -1016.39,-1230.75 -984.41,-1198.77 -941.39,-1201.99 -941.39,-1320.14 v1(-954,-1332.75) ; v1(-1270,-359.75) -1198,-287.75 -618.4,-287.75 -601.4,-304.75 -409,-304.75 -235.13,-478.62 SD1.7 -152.13,-478.62 v1(-141.99,-488.76)
"USD DAT1": R19.1 SD1.8 U3.52 | length 1420.5
  Top Layer w8: U3.52 -601.19,-1150.56 v1(-585,-1166.75) ; v1(-433,-1166.75) -343.9,-1166.75 -287.99,-1110.84 v1(-287.99,-1036.75) ; v1(-240,-425.75) -108.05,-425.75 R19.1
  Bottom Layer w8: v1(-585,-1166.75) v1(-433,-1166.75) ; v1(-287.99,-1036.75) -263,-1036.75 -66,-839.75 -66,-522.75 -153.44,-435.31 SD1.8 -230.44,-435.31 v1(-240,-425.75)
"USD DAT2": R14.1 SD1.1 U3.26 | length 1352.5
  Top Layer w8: U3.26 v1(-962,-1091.56) ; v1(-187.72,-796.75) -166.28,-796.75 R14.1
  Bottom Layer w8: v1(-962,-1091.56) -950.81,-1102.75 -865.56,-1102.75 -807.81,-1160.49 -692.74,-1160.49 -673,-1140.75 -463.81,-1140.75 -426,-1102.94 -426,-970.46 -252.06,-796.52 -252.06,-752.81 -237.71,-738.46 SD1.1@-196,-738.46 ; SD1.1 SD1.1@-196,-738.46 ; v1(-187.72,-796.75) -196,-788.47 SD1.1@-196,-738.46
"USD DAT3": R15.1 SD1.2 U3.37 | length 1558.3
  Top Layer w8: U3.37 -927.43,-1199.18 v1(-870,-1141.75) ; v1(-258,-695.15) -215.18,-695.15 -180.78,-660.75 -146.06,-660.75 -126,-680.81 R15.1
  Bottom Layer w8: v1(-870,-1141.75) -834,-1177.75 -762,-1177.75 -744.05,-1195.7 -422,-1195.7 -402,-1175.7 -402,-972.75 -250,-820.75 -174,-820.75 -153,-799.75 -153,-703.75 SD1.2 v1(-258,-695.15)
VCC: BLE3.17 BLE3.19 C9.1 C10.1 C11.1 C12.1 C13.1 C18.1 C19.1 C21.1 C30.1 D2.4 ICSP3.1 ICSP4.1 R10.2 R11.2 R12.2 R13.2 R14.2 R15.2 R16.2 R17.2 R18.2 R19.2 SD1.4 U3.7 U3.18 U3.45 U3.58 U6.1 | length 7719.7
  Top Layer w8: U6.1 -1306,-289.57 -1281.85,-313.73 C30.1 ; v1(-1158,-243.75) -1206,-291.75 -1238.29,-291.75 C30.1 ; v1(-1100.74,-857.01) -1100.74,-740.75 -1159.47,-682.03 -1159.47,-665.61 -1166.5,-658.58 -1176.76,-658.58 -1176.76,-550.92 C11.1 -1198,-543.91 -1230.16,-511.75 C10.1 -1230.16,-391.75 -1238.29,-383.62 C30.1 ; U3.18 -1025,-933.56 v1(-1010.81,-947.75) ; v1(-1042.1,-243.75) R12.2 -982,-195.65 -899.1,-112.75 -776,-112.75 -729,-159.75 -729,-351.75 -778.44,-401.19 ; v1(-920.4,-937.75) -839.25,-931.41 -828.43,-930.56 ; C9.1 -778.44,-401.19 ; v1(-838.53,-940.66) -828.43,-930.56 ; U3.7 -828.43,-930.56 ; v1(-784.06,-1080.49) v1(-784.06,-1120.43) -784.06,-1135.69 -769.43,-1150.32 U3.45 ; v1(-695.19,-1031.56) U3.58 ; R11.2 -615.21,-247.75 ; BLE3.17 BLE3.17@-506,-1135.87 ; v1(-506,-1103.75) BLE3.17@-506,-1135.87 ; D2.4 D2.4@-451,-76.97 ; BLE3.19 -431.19,-1045.13 -482,-1045.13 -482,-1135.87 BLE3.17@-506,-1135.87 ; C12.1 -316.97,-670.72 -304,-657.75 -304,-235.75 -348.77,-190.98 -348.77,-177.98 ; v1(-261,-600.75) -233.91,-600.75 ; C18.1 -191.14,-628 -201,-618.14 C19.1 -233.91,-600.75 ; v1(-75.35,-1017.1) R14.2 -75.35,-711.75 -75.28,-711.68 R15.2 -75.28,-663.75 -75.03,-663.5 R16.2 -55.15,-626.43 -74.54,-607.04 R17.2 -74.54,-569.75 -75.03,-569.26 R13.2 -75.03,-520.75 -74.3,-520.02 R18.2 -74.3,-458.75 -72.34,-456.79 R19.2 -72.34,-408.41 ; -778.44,-401.19 -735.73,-401.19 -615.21,-280.67 -615.21,-247.75 ; -615.21,-247.75 -606.21,-256.75 -561,-256.75 -539.22,-234.97 -539.22,-138.97 -477.22,-76.97 D2.4@-451,-76.97 ; D2.4@-451,-76.97 -451,-63.75 -423,-35.75 -374,-35.75 -348.77,-60.98 -348.77,-177.98 ; -348.77,-177.98 -290.86,-235.89 -145.22,-235.89 -139.12,-229.79 R10.2 -102,-242.18 -102,-252.75 -72.34,-282.41 -72.34,-408.41 ; -233.91,-600.75 -233.91,-559.84 -282,-511.75 -282,-415.75 -265,-398.75 -82,-398.75 -72.34,-408.41
  Bottom Layer w8: v1(-1158,-243.75) v1(-1042.1,-243.75) ; v1(-1100.74,-857.01) -1056,-857.01 ; v1(-1010.81,-947.75) -1001.19,-957.37 -1000.38,-957.37 ; ICSP4.1 -981.66,-678.75 -1047,-678.75 -1056,-687.75 -1056,-857.01 ; C21.1 -1000.38,-957.37 ; v1(-920.4,-937.75) -920.4,-905.75 -945.82,-880.33 -1014,-880.33 -1031,-897.33 -1031,-926.75 ; v1(-838.53,-940.66) -814.09,-940.66 -709.19,-1045.56 ; v1(-784.06,-1120.43) -744.12,-1080.49 ; v1(-784.06,-1080.49) -744.12,-1080.49 ; v1(-695.19,-1031.56) -709.19,-1045.56 ; v1(-506,-1103.75) -651,-1103.75 ; v1(-261,-600.75) -253.21,-608.54 SD1.4 ; ICSP3.1 -103.42,-1653.75 -68,-1653.75 -46,-1631.75 -46,-1558.75 -178,-1426.75 -178,-1119.75 v1(-75.35,-1017.1) ; -1056,-857.01 -1056,-901.75 -1031,-926.75 ; -1031,-926.75 -1000.38,-957.37 ; -744.12,-1080.49 -687.99,-1080.49 -664.73,-1103.75 -651,-1103.75 ; -744.12,-1080.49 -709.19,-1045.56 ; -709.19,-1045.56 -651,-1103.75
"VOUT SUIT": C29.1 P1.1@-1427.48,-507.19 U5.12 U5.13 U6.5 U6.8 | length 1407.1
  Top Layer w8: U6.8 -1456.99,-315.79 -1454.04,-318.75 C29.1 -1454.04,-480.63 P1.1@-1427.48,-507.19 ; U6.5 -1447,-212.8 -1447,-199.75 -1430,-182.75 v1(-1427,-182.75) ; U5.12 -1008.72,-533.65 v1(-931,-455.93)
  Bottom Layer w8: P1.1@-1427.48,-507.19 P1.1@-1427,-507.19 ; v1(-1427,-182.75) P1.1@-1427,-507.19 ; U5.13 U5.12 ; v1(-931,-455.93) -987.18,-399.75 -1248.63,-399.75 -1342.09,-493.21 -1342.38,-493.21 -1356.36,-507.19 P1.1@-1427,-507.19
XIN12: C34.1 U3.62 X2.2 | length 426.6
  Top Layer w8: U3.62 -601.12,-953.56 -580,-932.44 v1(-580,-924.62) ; X2.2 -401,-825.58 -393.82,-818.4 ; v1(-417,-821.75) -413.65,-818.4 -393.82,-818.4 ; C34.1 -393.82,-818.4
  Bottom Layer w8: v1(-580,-924.62) -477.13,-821.75 v1(-417,-821.75)
XIN32: C32.1 U3.32 X1.2 | length 546.6
  Top Layer w8: X1.2 -1206,-1126.27 -1122.71,-1209.56 ; C32.1 -1182.3,-911.25 -1166,-911.25 -1146,-931.25 v1(-1146,-1011.75) ; v1(-1146,-1190.75) -1146,-1199.75 -1136.19,-1209.56 -1122.71,-1209.56 ; U3.32 -1122.71,-1209.56
  Bottom Layer w8: v1(-1146,-1190.75) v1(-1146,-1011.75)
XOUT12: C33.1 U3.61 X2.1 | length 706.4
  Top Layer w8: U3.61 -589.81,-972.56 -556,-938.75 -556,-898.75 -566,-888.75 v1(-585,-888.75) ; v1(-495,-689.75) -495,-738.27 X2.1 -520.56,-768.19 -510,-778.75 -421,-778.75 -412.62,-770.37 C33.1
  Bottom Layer w8: v1(-585,-888.75) -629.19,-844.56 -629.19,-815.75 -608.37,-794.94 -566.91,-794.94 -523.22,-751.25 -523.22,-717.97 v1(-495,-689.75)
XOUT32: C31.1 U3.31 X1.1 | length 713.3
  Top Layer w8: v1(-1247,-988.75) -1247,-1023.91 X1.1 -1207,-1023.91 -1207,-871.33 -1198,-862.33 C31.1 ; U3.31 -1039.81,-1189.56 v1(-1031,-1180.75)
  Bottom Layer w8: v1(-1247,-988.75) -1247,-1119.12 -1170,-1196.12 -1170,-1202.75 -1158,-1214.75 -1062,-1214.75 -1031,-1183.75 v1(-1031,-1180.75)
pads on no net: BLE3.12 BLE3.13 BLE3.14 BLE3.20 BLE3.21 ICSP3.0 ICSP3.7 ICSP4.0 ICSP4.7 S1.0 S2.0 S3.0 U3.1 U3.40 U3.55 U5.3 U5.4 U5.5 U5.6 U5.7 U5.8 U5.9 U5.10 U5.15 U5.16 U5.17 U5.19 U5.20 U5.21 U5.22 U5.23 U5.24 U5.25 U5.26 U5.27 U5.31 U5.34 U5.35 U5.36 U5.37 U5.38 U5.39 U5.40 U5.41 U5.42 U5.43 U5.44 U5.45 U5.46 U5.47 U6.2 U6.3 U6.6 U6.7
copper on no net:
  other v1: -727.44,-1120.49

## Polygon pours and split planes (outlines as drawn)
GND on Bottom Layer "Bottom Layer-No Net" (solid, remove dead copper, pour order 7): -1500,-1574.85 -1495.85,-1570.7 -0.74,-1570.7 0,-1569.96 0,0 -1500,0
GND on Top Layer "Bottom Layer-No Net" (solid, remove dead copper, pour order 6): -1500,-1574.85 -1495.85,-1570.7 -0.74,-1570.7 0,-1569.96 0,0 -1500,0

## Other copper
Bottom Layer:
  pour cut-out: -954.47,-264.74 -754.47,-264.74 -754.47,-314.74 -954.47,-314.74

## Silkscreen, mask and mechanical layers (free items; w line width, h text height)
Top Overlay:
  drawing of 191 lines, arcs and shapes, not listed
  text "VCC" at -1260.97,-361.84 h19.68
  text "+" at -846.84,-411.91 h59.06 r90
  text "GND" at -1255.96,-412.66 h19.68
  text "CS" at -1267.75,-508.07 h19.68
Bottom Overlay:
  text "Vocore Test V1.0" at -532.6,-130.6 h60
Mechanical 20:
  lines w10: -1083.42,-1687.5 -572.83,-1687.5 -572.79,-1687.45 -416.54,-1687.45 -62.26,-1687.5 0,-1687.5 0,0 -1500,0 -1500,-1687.5 -1083.42,-1687.5 ; -1083.42,-1687.5 -1083.42,-1687.5
Mechanical 27:
  lines w6.3: -1500,-1687.5 -1500,0 0,0 0,-1687.5

## Text inside footprints (layer, text, board x,y; h text height)
U3: Top Overlay "*" at -728.83,-793.19 h77.5 r270; Mechanical 16 "*" at -711.43,-828.56 h77.5 r270